# EAGLE board USB Multiplicator 2023 (EAGLE 9.6.2)
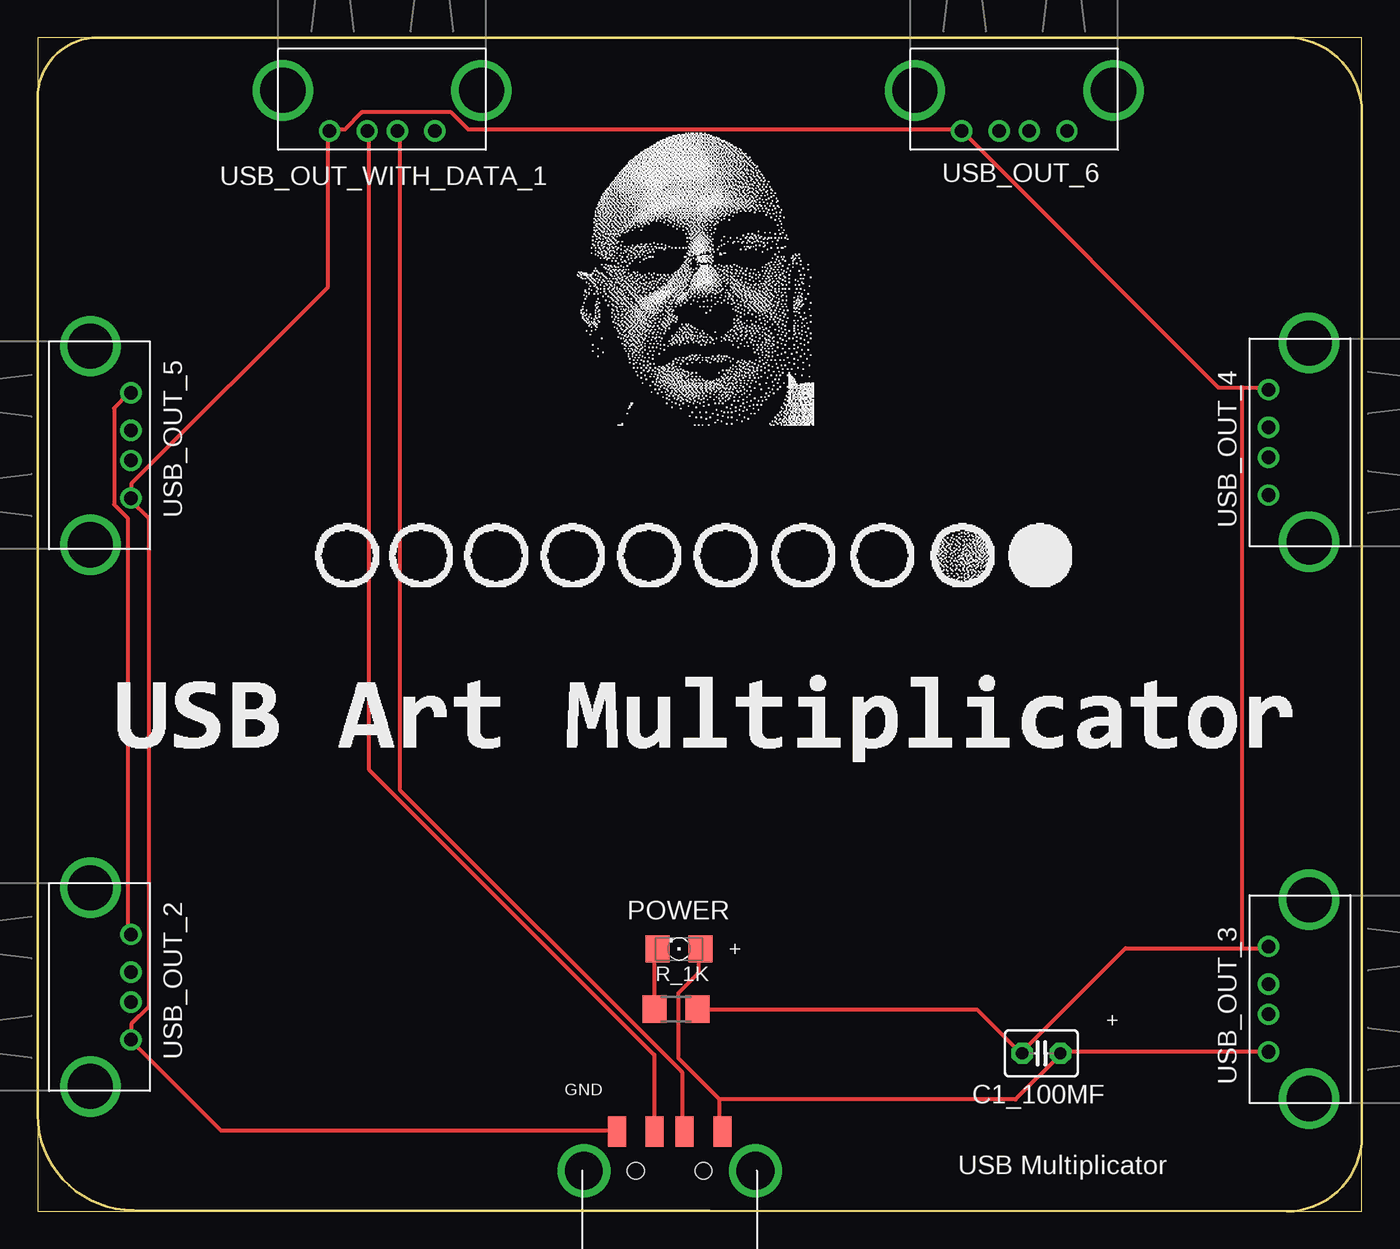
[diagram p0: board, top side]
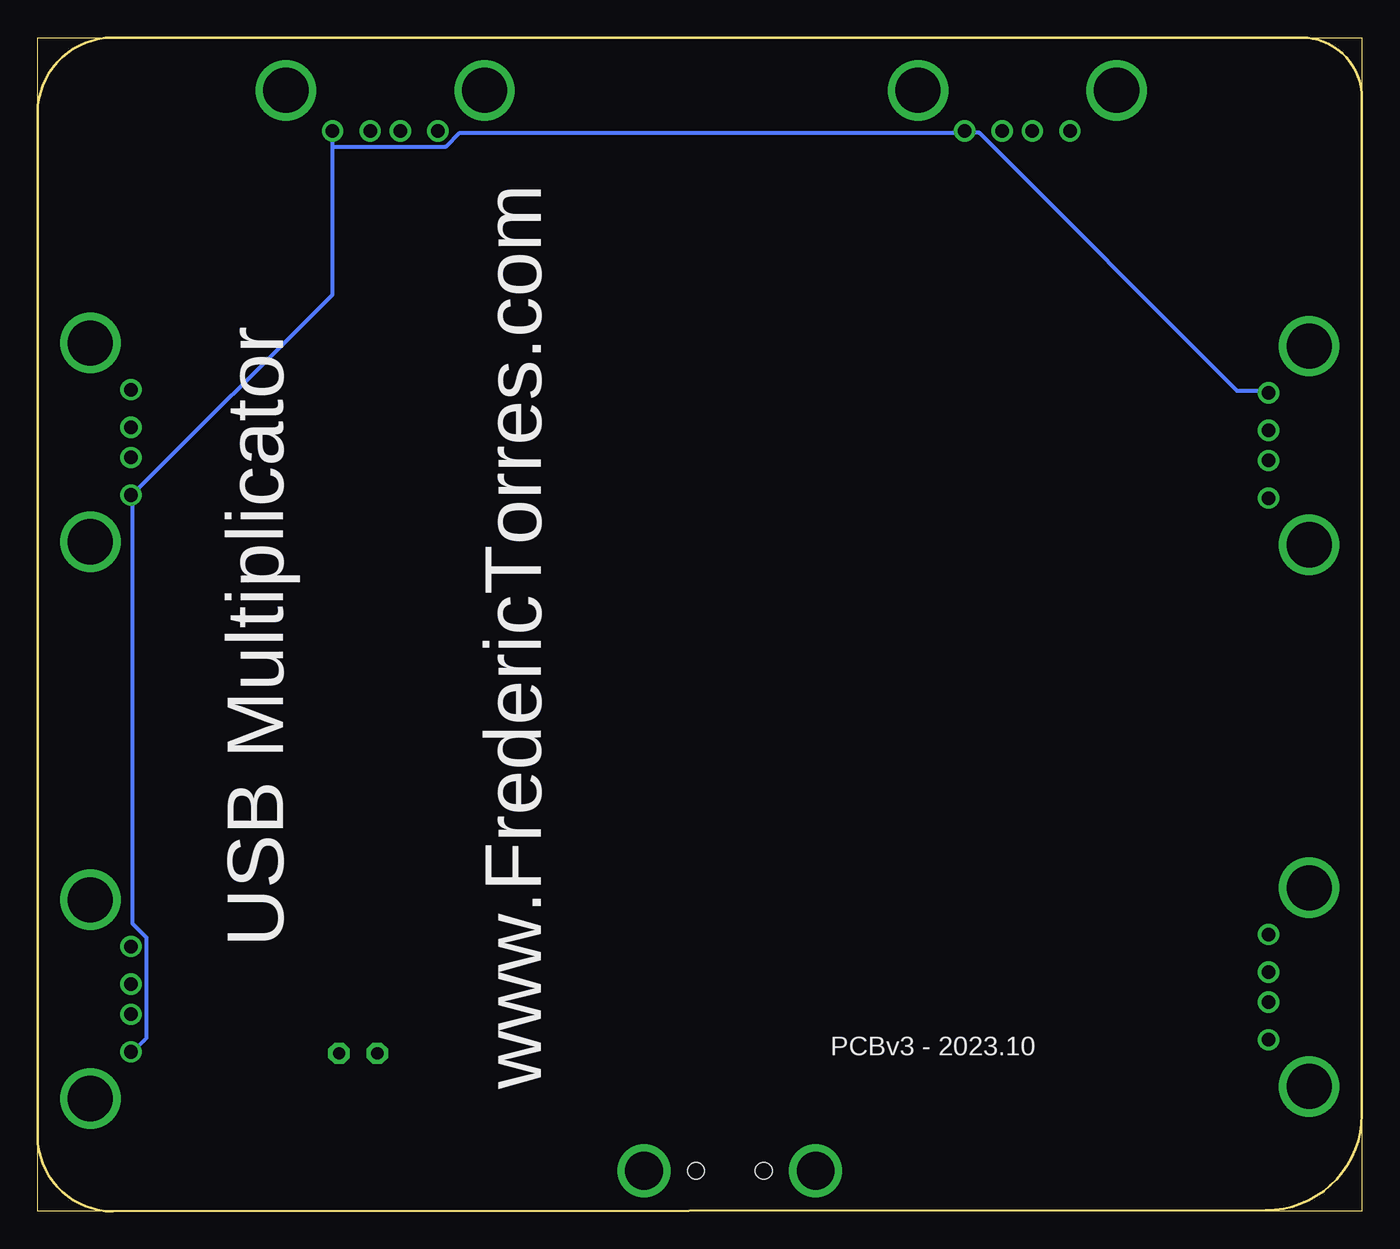
[diagram p1: board, bottom side, seen from below]

Size 88 x 78 mm. Coordinates in mm from the lower left corner, seen from the top.
Outline: 0,0 88,0 88,78 0,78 0,0
Outline: 0,6.4 0,74 arc-90 4,78 83,78 arc-90 88,73 88,5 arc-90 83,0 6.37,0.09 arc-90 0,6.4
Copper layers (1*16): Top 0.035mm / dielectric 1.5mm / Bottom 0.035mm
Design rules "default": minimum track width 10mil, minimum drill 24mil, track to track 8mil, track to pad 8mil, pad to pad 8mil, via to via 8mil, smd to smd 8mil, copper to edge 40mil, drill to drill 8mil, minimum pad ring 10mil, minimum via ring 8mil, stop-mask expansion 4mil, vias tented up to drill 0mil, thermal gap 10mil

## Footprints (pad centres in the part's own frame; a part is rotated, then mirrored left to right if it is on the bottom)
C025-030X050 = drill 0.813 pad 1.422 octagon: 1 -1.27,0; 2 1.27,0
1206 = smd 1.6 x 1.803: A -1.422,0; C 1.422,0
R1206 = smd 1.6 x 1.803: 1 -1.422,0; 2 1.422,0
USB-FEMALE-A-PTH = drill 0.9: D+ 5.9,1.3; D- 7.9,1.3; GND 3.4,1.3; VBUS 10.4,1.3 | drill 3: GND@1 13.5,4; GND@2 0.3,4
MOLEX_480371000 = smd 1.2 x 2: 1 3.5,2.6; 2 1,2.6; 3 -1,2.6; 4 -3.5,2.6 | drill 2.5: M1 -5.7,0; M2 5.7,0 | hole 1.1: -2.25,0; 2.25,0

## Placement (x,y rotation side)
C1_100MF  [C025-030X050]  66.7,10.5 0 top
LED_PWR  [1206]  42.63,17.44 180 top
R_1K  [R1206]  42.43,13.44 180 top
USB_OUT_2  USB  [USB-FEMALE-A-PTH]  7.5,8 90 top
USB_OUT_3  USB  [USB-FEMALE-A-PTH]  80.5,21 270 top
USB_OUT_4  USB  [USB-FEMALE-A-PTH]  80.5,58 270 top
USB_OUT_5  USB  [USB-FEMALE-A-PTH]  7.5,44 90 top
USB_OUT_6  USB  [USB-FEMALE-A-PTH]  58,70.5 0 top
USB_OUT_WITH_DATA_1  USB  [USB-FEMALE-A-PTH]  16,70.5 0 top
X1  USB-A  [MOLEX_480371000]  42,2.7 0 top

## Library data of the parts
C1_100MF LED_PWR R_1K X1 = adafruit
USB_OUT_2-USB_OUT_6 USB_OUT_WITH_DATA_1 = STUNTAZ

## Nets
GND: C1_100MF.1 R_1K.1 USB_OUT_2.GND USB_OUT_3.GND USB_OUT_4.GND USB_OUT_5.GND USB_OUT_6.GND USB_OUT_WITH_DATA_1.GND X1.4
N$5: LED_PWR.C R_1K.2
USB_DMINUS: USB_OUT_WITH_DATA_1.D- X1.2
USB_DPLUS: USB_OUT_WITH_DATA_1.D+ X1.3
VCC: C1_100MF.2 LED_PWR.A USB_OUT_2.VBUS USB_OUT_3.VBUS USB_OUT_4.VBUS USB_OUT_5.VBUS USB_OUT_6.VBUS USB_OUT_WITH_DATA_1.VBUS X1.1

## Tracks (layer width: path | path; a pad name or v marks a point on that pad's centre or on a via)
GND
  Top 0.254: X1.4 38.46,5.37 12.17,5.37 6.23,11.32 USB_OUT_2.GND 6.23,11.55 6.23,12.46 7.37,13.6 7.37,46.06 6.23,47.21 USB_OUT_5.GND 6.23,47.44 6.23,48.35 19.26,61.38 19.26,71.67 USB_OUT_WITH_DATA_1.GND 19.49,71.9 20.4,71.9 21.55,73.04 27.49,73.04 28.63,71.9 61.32,71.9 USB_OUT_6.GND 61.55,71.67 78.47,54.75 80.07,54.75 | 80.07,54.75 81.67,54.75 USB_OUT_4.GND | R_1K.1 43.95,13.38 62.47,13.38 65.21,10.63 C1_100MF.1 65.44,10.63 72.3,17.49 80.07,17.49 | 80.07,17.49 81.67,17.49 USB_OUT_3.GND | 80.07,17.49 80.07,54.75
N$5
  Top 0.254: R_1K.2 40.98,13.6 40.98,17.26 LED_PWR.C
USB_DMINUS
  Top 0.254: X1.2 42.81,5.37 42.81,9.26 24.06,28.01 24.06,71.67 USB_OUT_WITH_DATA_1.D-
USB_DPLUS
  Top 0.254: X1.3 40.98,5.37 40.98,10.4 22,29.38 22,71.67 USB_OUT_WITH_DATA_1.D+
VCC
  Top 0.254: USB_OUT_2.VBUS 6,18.4 6,46.06 5.09,46.98 5.09,53.38 6,54.29 USB_OUT_5.VBUS | 45.32,7.43 42.58,10.17 42.58,14.52 43.95,15.89 43.95,17.26 LED_PWR.A | 45.32,7.43 45.32,5.37 X1.1 | USB_OUT_3.VBUS 81.67,10.63 68.18,10.63 C1_100MF.2 67.95,10.4 64.98,7.43 45.32,7.43
  Bottom 0.254: USB_OUT_5.VBUS 6.23,54.52 8.29,54.52 25.43,71.67 26.35,71.67 USB_OUT_WITH_DATA_1.VBUS 26.57,71.67 59.95,71.67 60.87,70.75 68.41,70.75 | 68.41,70.75 68.41,60.92 81.67,47.66 USB_OUT_4.VBUS 81.67,47.44 81.67,19.09 80.75,18.18 80.75,11.55 81.67,10.63 USB_OUT_3.VBUS | 68.41,70.75 68.41,71.67 USB_OUT_6.VBUS

## Text on the board
tNames: POWER | + | + | GND | USB Multiplicator
bNames: USB Multiplicator / / / www.FredericTorres.com | PCBv3 - 2023.10